# Altium PCB TDA7000_PCB.PcbDoc
Units mm, origin at the board's own origin, x right, y up, seen from the top; angles counter-clockwise.
Board outline 33.01 x 89.01 mm, 2 copper layers (Top Layer, Jumper Layer); 41 components, 37 nets, 144 pads, 0 vias.
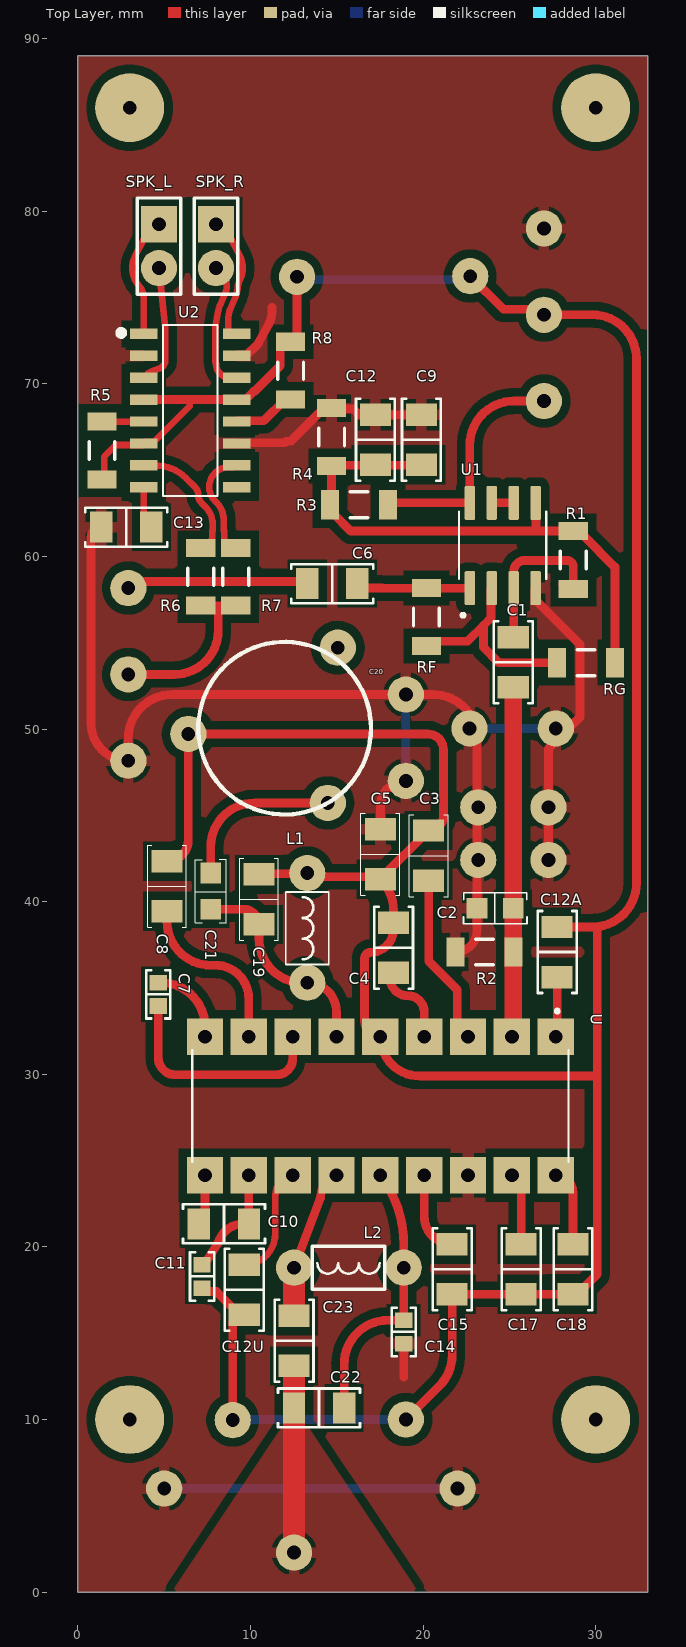
[diagram p0: Top Layer view]
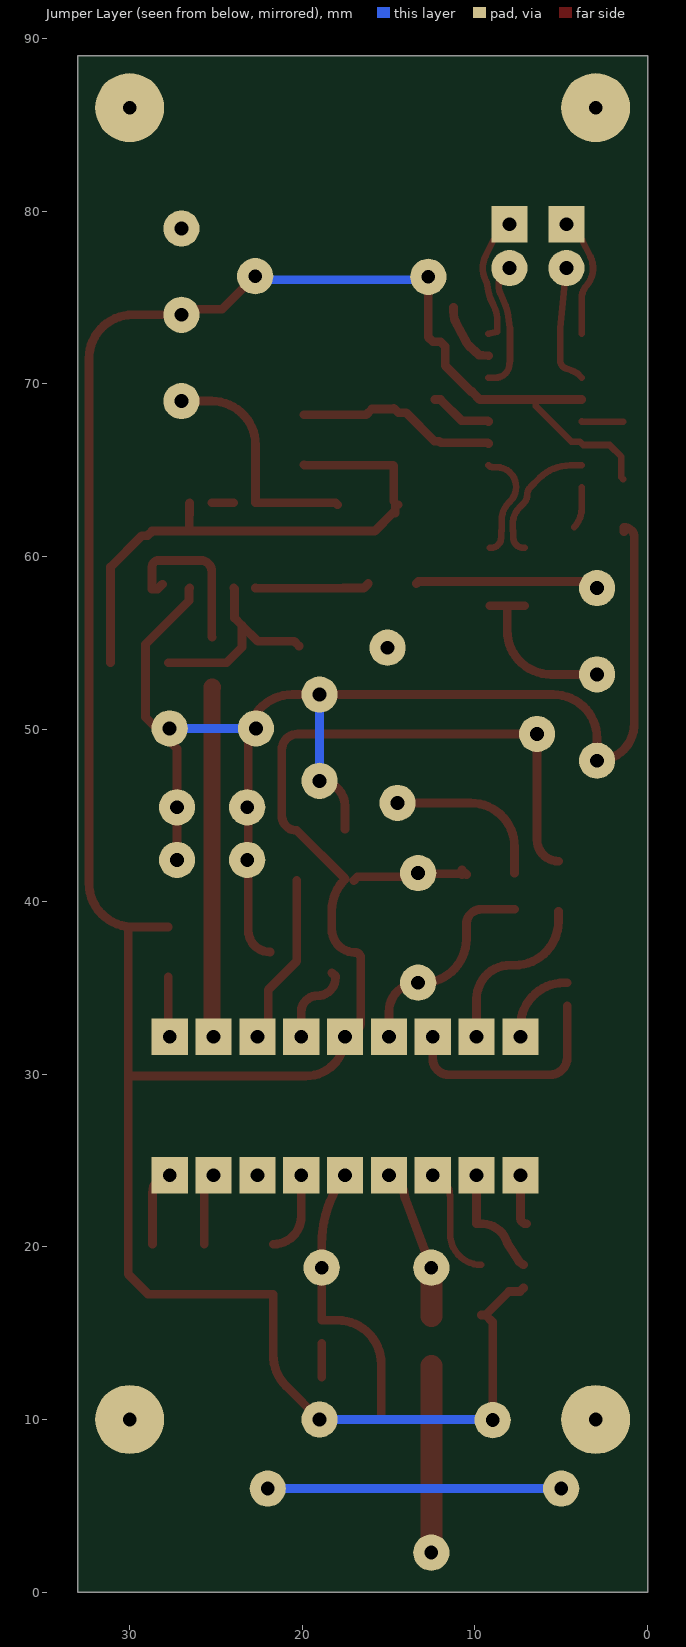
[diagram p1: Jumper Layer view, seen from below]
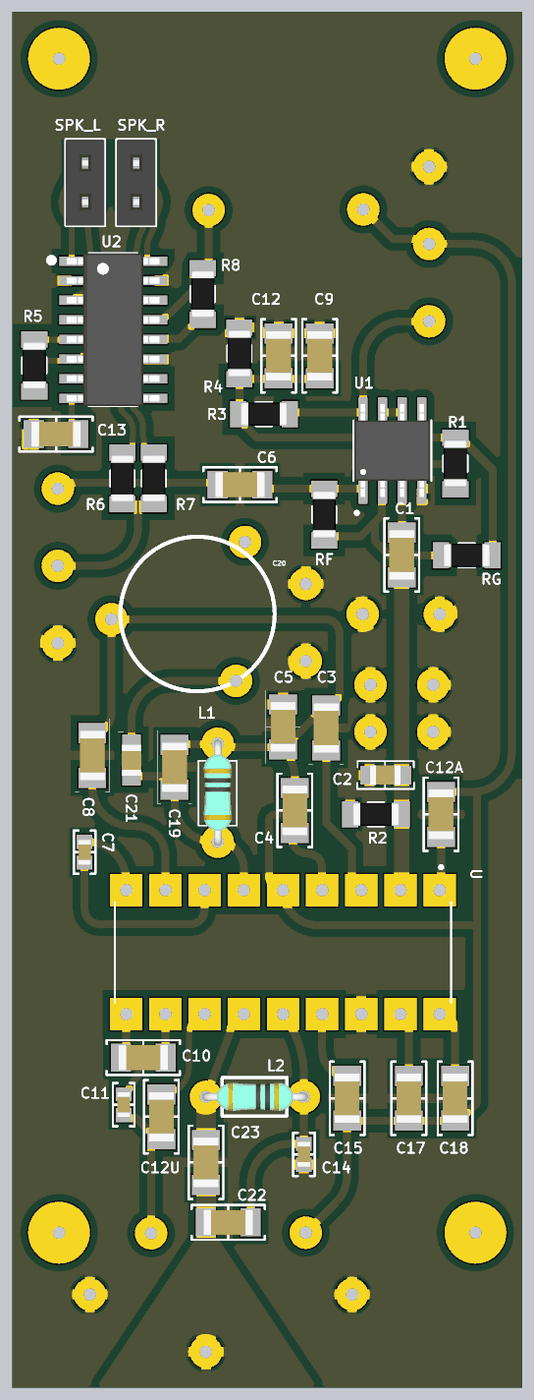
[diagram p2: 3D render of the assembled board from above, using the file's embedded part models]

## Layer stack, top to bottom
Top Solder: solder mask 0.0102, Solder Resist, Dk 3.5
Top Layer: signal copper 0.0356
Dielectric 1: dielectric 0.32, FR-4, Dk 4.8
Jumper Layer: signal copper 0.0356
Bottom Solder: solder mask 0.0102, Solder Resist, Dk 3.5

## Board outline
0,-0.005 33,-0.005 33.005,0 33.005,89 33,89.005 0,89.005 -0.005,89

## Design rules (kind name [scope] priority, off if disabled: settings)
Clearance [All] p1: gap=0.254 ignorepadtopadclearanceinfootprint=FALSE except(0.5: Arc-Poly Track-Poly SMDPad-Poly THPad-Poly Via-Poly Fill-Poly Poly-Poly Poly-Region Poly-Text Poly-Hole)
DiffPairsRouting [All] p1: maxlimit=0.254 minlimit=0.254 mostfreqgap=0.254 toplayer_minwidth=0.381 toplayer_maxwidth=0.381 toplayer_prefwidth=0.381 bottomlayer_minwidth=0.381 bottomlayer_maxwidth=0.381 bottomlayer_prefwidth=0.381 maxuncoupledlength=12.7
PolygonConnect [All] p1: connectstyle=Relief reliefconductorwidth=0.635 reliefentries=4 polygonreliefangle="90 Angle" airgapwidth=0.254
RoutingVias [All] p1: holewidth=0.711 width=1.27 viastyle="Through Hole" minholewidth=0.711 minwidth=1.27 maxholewidth=0.711 maxwidth=1.27
SilkToSilkClearance [All] p1: silktosilkclearance=0.1
SilkToSolderMaskClearance [IsPad] p1: minsilkscreentomaskgap=0.1 clearancetoexposedcopper=TRUE
SolderMaskExpansion [All] p1: expansion=0.102 istentingtop=FALSE
SupplyNets "Schematic Supply Nets_7" [InNet('+12V')] p1: voltage=0.000
SupplyNets "Schematic Supply Nets_6" [InNet('+5V')] p2: voltage=0.000
SupplyNets "Schematic Supply Nets_5" [InNet('Vref')] p3: voltage=0.000
SupplyNets "Schematic Supply Nets_4" [InNet('PREAMP')] p4: voltage=0.000
SupplyNets "Schematic Supply Nets_3" [InNet('OUTPUT')] p5: voltage=0.000
SupplyNets "Schematic Supply Nets_2" [InNet('GND')] p6: voltage=0.000
SupplyNets "Schematic Supply Nets" [InNet('ANT')] p7: voltage=0.000
Width [All] p1: maxlimit=1.397 minlimit=0.254 preferedwidth=0.254 minimp=50.000000 maximp=50.000000 favimp=50.000000
27 further rules are at their usual default settings.

## Classes and differential pairs
differential pair IN: +IN_P -IN_N
differential pair SPK_R: +SPK_R_P -SPK_R_N
differential pair SPK_L: +SPK_L_P -SPK_L_N

## Components (designator, comment, footprint, x,y, rotation, side; value= is the part's Value field where it differs from the comment)
C1 "1uF" "CAP 1206/3216" 25.222,53.876 r90 top
C2 "1.8nF" "CAP 0805/2012" 24.151,39.624 r180 top
C3 "22nF" "CAP 1206/3216" 20.32,42.672 r90 top
C4 "10nF" "CAP 1206/3216" 18.288,37.338 r90 top
C5 "10nF" "CAP 1206/3216" 17.526,42.746 r270 top
C6 "1uF" "CAP 1206/3216" 14.732,58.426 r180 top
C7 "3.3nF" "CAP 0603/1608" 4.652,34.631 r90 top
C8 "180pF" "CAP 1206/3216" 5.16,40.894 r270 top
C9 "10uF" "CAP 1206/3216" 19.902,66.765 r270 top
C10 "330pF" "CAP 1206/3216" 8.462,21.336 r0 top
C11 "3.3nF" "CAP 0603/1608" 7.192,18.288 r270 top
C12 "100nF" "CAP 1206/3216" 17.235,66.765 r270 top
C12A "150nF" "CAP 1206/3216" 27.766,37.084 r90 top
C12U "150pF" "CAP 1206/3216" 9.635,17.506 r270 top
C13 "1uF" "CAP 1206/3216" 2.806,61.695 r0 top
C14 "2.2nF" "CAP 0603/1608" 18.876,15.073 r270 top
C15 "100nF" "CAP 1206/3216" 21.682,18.7 r90 top
C17 "330pF" "CAP 1206/3216" 25.682,18.7 r90 top
C18 "220pF" "CAP 1206/3216" 28.682,18.7 r90 top
C19 "27pF" "CAP 1206/3216" 10.494,40.132 r270 top
C20 "VISHAY Trimmer Cap Fig1" FIG2 11.978,50.05 r30 top
C21 "56pF" "CAP 0805/2012" 7.7,40.581 r270 top
C22 "47pF" "CAP 1206/3216" 13.97,10.668 r180 top
C23 "39pF" "CAP 1206/3216" 12.526,14.552 r270 top
L1 "56nH" "Inductor - 10uH (1/8)" 13.288,41.656 r270 top
L2 "Value?" "Inductor - 10uH (1/8)" 18.876,18.796 r180 top
R1 "100k" "RES 1206 (3216X08L)" 28.702,58.495 r90 top
R2 "22k" "RES 1206 (3216X08L)" 22.253,37.084 r0 top
R3 "47k" "RES 1206 (3216X08L)" 14.986,62.992 r0 top
R4 "47k" "RES 1206 (3216X08L)" 14.695,68.214 r270 top
R5 "10k" "RES 1206 (3216X08L)" 1.397,67.437 r270 top
R6 "1k" "RES 1206 (3216X08L)" 7.112,60.123 r270 top
R7 "1k" "RES 1206 (3216X08L)" 9.144,60.123 r270 top
R8 "10k" "RES 1206 (3216X08L)" 12.319,72.061 r270 top
RF "22k" "RES 1206 (3216X08L)" 20.193,57.785 r270 top
RG "10k" "RES 1206 (3216X08L)" 30.734,53.848 r180 top
SPK_L "2" HDR_THT_2F_2.54mm#1 4.699,77.978 r270 top
SPK_R "2" HDR_THT_2F_2.54mm#2 8.001,77.978 r90 top
U "TDA7000" DIP802W45P254L2180H470Q18 17.522,28.162 r270 top
U1 "NE5532D" SOIC127P599X175-8N 24.613,60.636 r90 top
U2 "PAM8403DR" SOIC127P605X150-16N 6.51,68.453 r0 top

## Footprints (in the part's own frame and the unit in brackets; to place one, negate y for a bottom-side part, rotate by r counter-clockwise, add the part's x,y. Pads: shape width x height; smd on the part's side, far side on the other; paste and mask are expansions set on the pad)
"CAP 0603/1608" [mm] "Chip Capacitor, 2-Leads, Body 1.60x0.80mm, IPC Medium Density"
  rect 0.9x1 smd: 1(-0.675,0) 2(0.675,0)
  silkscreen extent -1.4,-0.7 1.4,0.7, body extent -0.8,-0.41 0.8,0.41, height 0.82
"CAP 0805/2012" [mm] "Chip Capacitor, 2-Leads, Body 2.00x1.20mm, IPC Medium Density"
  rect 1.2x1.2 smd: 1(-1.075,0) 2(1.025,0)
  silkscreen extent -1.86,-0.9 1.82,0.9, body extent -1,-0.64 1,0.64, height 1.26
"CAP 1206/3216" [mm] "Chip Capacitor, 2-Leads, Body 3.25x1.60mm, IPC Medium Density"
  rect 1.3x1.8 smd: 1(-1.45,0) 2(1.45,0)
  silkscreen extent -2.37,-1.12 2.37,1.12, body extent -1.6,-0.81 1.6,0.81, height 1.62
DIP802W45P254L2180H470Q18 [mm]
  rect 2.1x2.1 hole 0.8: 1(-4.012,10.16) 2(-4.012,7.62) 3(-4.012,5.08) 4(-4.012,2.54) 5(-4.012,0) 6(-4.012,-2.54) 7(-4.012,-5.08) 8(-4.012,-7.62) 9(-4.012,-10.16) 10(4.012,-10.16) 11(4.012,-7.62) 12(4.012,-5.08) 13(4.012,-2.54) 14(4.012,0) 15(4.012,2.54) 16(4.012,5.08) 17(4.012,7.62) 18(4.012,10.16)
  silkscreen extent -5.6,-10.9 3.24,10.9
FIG2 [mm]
  round 2.1 hole 0.8: 0(-5,2.5) 1(0,-5) 2(5,2.5)
  silkscreen extent -5,-5 5,5
HDR_THT_2F_2.54mm#1 [mm] "Socket Header, Pitch 2.54 mm, THT, Vertical, single row, 2p"
  rect 2.1x2.1 hole 0.8: 1(-1.27,0)
  round 2.1 hole 0.8: 2(1.27,0)
  silkscreen extent -2.79,-1.25 2.79,1.25, body extent -2.79,-1.25 2.79,1.25, height 8.55
HDR_THT_2F_2.54mm#2 [mm] "Socket Header, Pitch 2.54 mm, THT, Vertical, single row, 2p"
  round 2.1 hole 0.8: 1(-1.27,0)
  rect 2.1x2.1 hole 0.8: 2(1.27,0)
  silkscreen extent -2.79,-1.25 2.79,1.25, body extent -2.79,-1.25 2.79,1.25, height 8.55
"Inductor - 10uH (1/8)" [mm]
  round 2.1 hole 0.8: 1(0,0) 2(6.35,0)
  silkscreen extent 1.1,-1.25 5.3,1.25, body extent -0.25,-0.92 6.6,0.92, height 2.92
"RES 1206 (3216X08L)" [mm] "Chip Resistor, 2-Leads, Body 3.2x1.6mm, IPC High Density _ (0.125 W)"
  rect 1.05x1.7 smd: 1(-0.377,0) 2(2.973,0)
  silkscreen extent 0.8,-0.75 1.8,0.75, body extent -0.23,-0.76 2.82,0.76, height 0.6
SOIC127P599X175-8N [mm]
  rrect25% 1.97x0.6 smd paste+0 mask+0.102: 1(-2.47,1.905) 2(-2.47,0.635) 3(-2.47,-0.635) 4(-2.47,-1.905) 5(2.47,-1.905) 6(2.47,-0.635) 7(2.47,0.635) 8(2.47,1.905)
  silkscreen extent -4.14,-2.53 1.95,2.53, body extent -3,-2.45 3,2.45, height 1.75
SOIC127P605X150-16N [mm]
  rect 1.6x0.6 smd paste+0 mask+0.102: 1(-2.7,4.445) 2(-2.7,3.175) 3(-2.7,1.905) 4(-2.7,0.635) 5(-2.7,-0.635) 6(-2.7,-1.905) 7(-2.7,-3.175) 8(-2.7,-4.445) 9(2.7,-4.445) 10(2.7,-3.175) 11(2.7,-1.905) 12(2.7,-0.635) 13(2.7,0.635) 14(2.7,1.905) 15(2.7,3.175) 16(2.7,4.445)
  silkscreen extent -4.14,-4.95 1.58,4.95, body extent -3,-4.95 3,4.95, height 1.75

## Part data
C1 C3 C4 C5 C6 C9 C12 C12A C13 C15: library part Cap_Multi_SMD, "Bipolar ceramic capacitor SMD", Package=1206, Rating=X7R, Type=Type?, Validation=Valid, Inflow=inflow?
C2 C19 C21: library part Cap_Multi_SMD, "Bipolar ceramic capacitor SMD", Package=0805, Rating=C0G, Type=Type?, Validation=Valid, Inflow=inflow?
C7 C11 C14: library part Cap_Multi_SMD, "Bipolar ceramic capacitor SMD", Package=0603, Rating=C0G, Type=Type?, Validation=Valid, Inflow=inflow?
C8 C10 C12U C17 C18 C22 C23: library part Cap_Multi_SMD, "Bipolar ceramic capacitor SMD", Package=1206, Rating=C0G, Type=Type?, Validation=Valid, Inflow=inflow?
L1 L2: library part Ind_THT, "Inductor", Package=Package?, Rating=Rating?, Type=Type?, Validation=NT, Inflow=inflow?
R1 R2 R3 R4 R5 R6 R7 R8 RF RG: library part Res_SMD, "Resistor", Package=1206, Rating=Rating?, Type=10%, Validation=Valid, Inflow=inflow?
SPK_L SPK_R: library part Con_FPH_2x1_V_THT_2.54, "Header, single row, 2 pin", Package=Package?, Rating=Rating?, Type=Type?, Validation=NT, Inflow=8101
U: Package="DIP-18 MCM Electronics", Availability=Unavailable, MF="MCM Electronics", MP=TDA7000, Price=None, SnapEDA_Link=https://www.snapeda.com/parts/TDA7000/MCM%20Electronics/view-part/577349/?ref=snap
U1: "Dual, 30-V, 10-MHz, low-noise operational amplifier for audio applications", Package="SOIC-8 Texas Instruments", Check_prices=https://www.snapeda.com/parts/NE5532D/Texas+Instruments/view-part/?ref=eda, MF="Texas Instruments", MP=NE5532D, SnapEDA_Link=https://www.snapeda.com/parts/NE5532D/Texas+Instruments/view-part/?ref=snap
U2: "Amplifiers, Audio, 3W STEREO FILTERLESS CLASS-D AUDIO AMP", Package="SOP-16 Diodes Inc.", Check_prices=https://www.snapeda.com/parts/PAM8403DR/Diodes+Inc./view-part/?ref=eda, MF="Diodes Inc.", MP=PAM8403DR, SnapEDA_Link=https://www.snapeda.com/parts/PAM8403DR/Diodes+Inc./view-part/?ref=snap

## Free pads (board coordinates)
  round 4 hole 0.8: 0(3,10) 0(3,86) 0(30,10) 0(30,86)
  round 2.1 hole 0.8: 1(2.921,58.166) 2(2.921,53.166) 3(2.921,48.166) 9(12.526,2.286) 9(19,47) 9(19,52) 9(22.686,50.038) 9(23.194,42.418) 9(23.194,45.466) 9(27.258,42.418) 9(27.258,45.466) 9(27.686,50.038) 13(5,6) 13(8.97,9.962) 13(12.7,76.2) 13(19,10) 13(22,6) 13(22.73,76.238) 13(27,69) 13(27,74) 13(27,79)

## Nets (pads, with @x,y where several pads share a name; then routed paths per layer and width w, separated by ;. In a path a pad name is that pad's centre, name@x,y a point inside that pad or via, vN(x,y) a via of type N, cw(c..) or ccw(c..) an arc to the next point about the centre after c; other vN are vias at no path point)
+5V: C3.2 C4.2 C5.2 C8.1 C11.2 C12A.2 C12U.2 C15.1 C17.1 C18.1 C19.1 C20.0 L1.1 pad.13@8.97,9.962 pad.13@12.7,76.2 pad.13@19,10 pad.13@22.73,76.238 pad.13@27,74 R5.2 R8.1 U2.4 U2.6 U2.13 U.5 | length 201.8
  Top Layer w0.381: R5.2 1.524,64.591 1.524,65.786 2.194,66.456 3.718,66.456 3.919,66.657 4.42,66.657 6.477,68.715 6.477,69.088
  Top Layer w0.508: U2.4 6.477,69.088 9.71,69.088 10.172,69.55 10.22,69.55 11.723,71.053 11.723,72.167 11.994,72.438 12.429,72.438 12.7,72.709 pad.13@12.7,76.2 ; C8.1 ccw(c5.16,43.582) 6.398,43.582 C20.0 20.262,49.715 cw(c20.262,48.793) 21.184,48.793 21.184,44.986 cw(c20.32,44.986) C3.2 17.549,41.351 ccw(c17.603,41.296) C5.2 17.544,41.278 cw(c15.748,39.482) 18.288,39.482 C4.2 18.288,38.405 cw(c16.942,38.405) 16.942,37.059 ccw(c16.942,36.728) 16.612,36.728 16.612,33.085 ccw(c17.522,33.085) U.5 ccw(c19.801,32.175) 19.801,29.896 30,29.896 30.09,29.806 ; C11.2 7.388,17.417 8.024,17.417 C12U.2@9.385,16.056 ; pad.13@8.97,9.962 8.97,15.641 C12U.2@9.385,16.056 ; C12U.2 C12U.2@9.385,16.056 ; C19.1 C19.1@10.748,41.836 ; C19.1@10.748,41.578 10.789,41.619 13.251,41.619 L1.1 13.505,41.439 16.801,41.439 C5.2@17.018,41.222 ; pad.13@19,10 20.938,11.938 ccw(c19.142,13.734) 21.682,13.734 C15.1 C17.1 28.932,17.25 30.09,18.408 30.09,29.806 ; pad.13@22.73,76.238 22.739,76.238 24.653,74.324 26.676,74.324 27,74 29.82,74 cw(c29.82,71.46) 32.36,71.46 32.36,41.074 cw(c29.82,41.074) 29.919,38.536 cw(c29.82,41.074) 29.82,38.534 C12A.2 ; 29.919,38.534 30.09,38.363 30.09,29.806
  Jumper Layer w0.508: pad.13@8.97,9.962 9.008,10 pad.13@19,10 ; pad.13@12,76 cw(c12.038,76) 12.038,76.038 pad.13@22.03,76.038
+12V: pad.13@27,69 R3.2 U1.8 | length 13.9
  Top Layer w0.508: R3.2 18.073,63.106 U1.8 22.708,66.46 cw(c25.248,66.46) 25.248,69 pad.13@27,69
AMP_IN: pad.2 R6.2 R7.2 | length 10.1
  Top Layer w0.508: pad.2 5.588,53.166 ccw(c5.588,55.706) 8.128,55.706 8.128,57.15 ; R6.2 8.128,57.15 ; R7.2 8.128,57.15
ANT: C22.2 C23.2 pad.9@12.526,2.286 | length 10.8
  Top Layer w1.27: pad.9@12.526,2.286 12.526,10.16 C23.2
GND: C2.2 C5.1 C9.1 C12.1 C13.1 C14.2 pad.3 pad.9@19,47 pad.9@19,52 pad.9@22.686,50.038 pad.9@23.194,42.418 pad.9@23.194,45.466 pad.9@27.258,42.418 pad.9@27.258,45.466 pad.9@27.686,50.038 pad.13@5,6 pad.13@22,6 pad.13@27,79 R2.1 R4.1 U1.4 U2.2 U2.11 U2.15 U.16 | length 118.6
  Top Layer w0.508: C13.1@1.356,61.445 C13.1 ccw(c1.356,61.1) 0.762,61.1 0.762,50.325 ccw(c2.921,50.325) pad.3 ; pad.3@2.921,48.317 pad.3 ; U2.11 9.256,66.594 11.984,66.594 12.065,66.675 12.34,66.675 13.985,68.32 14.424,68.32 R4.1 ; U2.15 9.756,71.674 10.354,72.224 ccw(c10.01,72.598) 10.455,72.354 11.05,73.44 ccw(c9.714,74.172) 11.238,74.172 11.238,74.422 ; R4.1@14.743,68.543 15.965,68.543 16.293,68.215 C9.1 ; C5.1 17.526,45.526 cw(c19,45.526) pad.9@19,47 ; 18.876,12.446 C14.2 ; R2.1 ccw(c21.876,38.334) 23.126,38.334 C2.2 23.126,49.46 ccw(c20.586,49.46) 20.586,52 19,52 5.461,52 ccw(c5.461,49.46) 2.921,49.46 pad.3 ; U1.4 26.564,58.12 26.564,57.435 29.083,54.916 29.083,50.689 27.258,48.864 27.258,45.466 pad.9@27.258,42.418
  Jumper Layer w0.508: pad.13@5,6 pad.13@22,6 ; pad.9@19,47 pad.9@19,52 ; pad.9@22.686,50.038 pad.9@27.686,50.038
IN_N: R7.1 U2.10 | length 6.5
  Top Layer w0.381: R7.1 9.056,60.5 cw(c9.056,61.071) 8.652,60.667 cw(c9.056,61.071) 8.484,61.071 8.484,61.437 ccw(c8.418,61.437) 8.465,61.485 cw(c8.512,61.532) 8.445,61.532 8.445,62.121 ccw(c7.015,62.121) 8.026,63.133 7.942,63.217 cw(c8.75,64.026) 7.607,64.026 cw(c8.75,64.026) 7.942,64.834 7.986,64.877 cw(c8.689,64.174) 8.689,65.169 8.946,65.169 ccw(c8.946,65.542) U2.10
IN_P: R6.1 U2.7 | length 7.6
  Top Layer w0.381: U2.7 4.471,65.278 cw(c4.471,62.738) 6.267,64.534 6.782,64.019 cw(c6.321,63.559) 6.972,63.559 ccw(c7.624,63.559) 7.163,63.098 7.391,62.87 cw(c6.38,61.858) 7.81,61.858 7.81,61.532 cw(c7.744,61.532) 7.791,61.485 ccw(c7.838,61.437) 7.772,61.437 7.772,61.071 cw(c7.2,61.071) 7.604,60.667 cw(c7.2,61.071) 7.2,60.5 R6.1
NetC1_2: C1.2 R1.1 U1.3 | length 9.8
  Top Layer w0.508: C1.2 25.248,55.351 U1.3 25.248,59.131 cw(c25.883,59.131) 25.883,59.766 28.346,59.766 cw(c28.346,59.411) 28.702,59.411 R1.1 28.377,58.118 R1.1@28.106,58.389
NetC3_1: C3.1 U.3 | length 10
  Top Layer w0.508: C3.1 20.32,36.547 21.975,34.892 21.975,32.802 U.3
NetC4_1: C4.1 U.4 | length 4.9
  Top Layer w0.508: C4.1 18.072,35.672 18.072,35.602 ccw(c19.13,35.602) 19.13,34.544 cw(c19.13,33.612) 20.062,33.612 U.4
NetC6_1: C6.1 RF.1 U1.1 | length 6.6
  Top Layer w0.508: C6.1 16.442,58.166 17.632,58.166 17.636,58.162 RF.1 22.704,58.162 U1.1
NetC7_1: C7.1 U.7 | length 13.1
  Top Layer w0.508: C7.1 4.652,30.969 ccw(c5.649,30.969) 5.649,29.972 11.51,29.972 ccw(c11.51,30.904) 12.442,30.904 U.7
NetC7_2: C7.2 U.9 | length 4.8
  Top Layer w0.508: C7.2 4.822,35.306 cw(c4.822,32.766) 7.362,32.766 U.9
NetC8_2: C8.2 U.8 | length 10.1
  Top Layer w0.508: C8.2 5.16,38.862 ccw(c7.7,38.862) 7.7,36.322 7.954,36.322 cw(c7.954,34.374) 9.902,34.374 U.8
NetC10_1: C10.1 U.10 | length 3
  Top Layer w0.508: C10.1 ccw(c7.012,21.686) 7.362,21.686 U.10
NetC10_2: C10.2 C11.1 U.11 | length 6.7
  Top Layer w0.508: C11.1 7.438,19.159 8.088,20.159 ccw(c7.662,20.436) 8.146,20.281 cw(c9.596,19.812) 9.516,21.334 9.565,21.336 C10.2 9.902,21.336 U.11
NetC12A_1: C12A.1 U.1 | length 3.5
  Top Layer w0.508: U.1 ccw(c27.682,32.259) 27.766,32.259 C12A.1
NetC12U_1: C12U.1 U.12 | length 6.7
  Top Layer w0.381: C12U.1 ccw(c9.635,20.751) 11.43,20.751 11.43,22.824 cw(c12.573,22.822) 11.442,22.985 ccw(c11.002,23.05) 11.446,23.042 cw(c12.589,23.017) 11.532,23.452 U.12
NetC13_2: C13.2 U2.8 | length 2.4
  Top Layer w0.381: U2.8 3.81,62.772 ccw(c5.334,62.772) C13.2
NetC14_1: C14.1 C22.1 L2.1 U.14 | length 16.6
  Top Layer w0.508: C22.1@15.426,10.16 15.426,13.208 cw(c17.966,13.208) 17.966,15.748 C14.1 L2.1 18.876,20.168 ccw(c12.343,20.168) U.14
NetC15_2: C15.2 U.15 | length 4.9
  Top Layer w0.508: U.15 20.062,21.77 ccw(c21.682,21.77) C15.2
NetC17_2: C17.2 U.17 | length 4.3
  Top Layer w0.508: U.17 cw(c25.142,23.61) 25.682,23.61 C17.2
NetC18_2: C18.2 U.18 | length 4.6
  Top Layer w0.508: U.18 cw(c27.682,23.15) 28.682,23.15 C18.2
NetC19_2: C19.2 C21.2 L1.2 U.6 | length 12.5
  Top Layer w0.508: C21.2 9.62,39.556 cw(c9.62,38.682) C19.2 10.494,37.846 ccw(c13.034,37.846) 13.034,35.306 L1.2 cw(c13.288,33.612) 14.982,33.612 U.6
NetC20_1: C20.1 C21.1 | length 9.8
  Top Layer w0.508: C21.1 7.7,43.18 cw(c10.24,43.18) 10.24,45.72 C20.1
NetC23_1: C23.1 L2.2 U.13 | length 8.8
  Top Layer w0.508: L2.2 14.05,22.84 14.136,23.304 U.13
  Top Layer w1.27: C23.1 L2.2
NetR5_1: R5.1 U2.5 | length 2.4
  Top Layer w0.381: R5.1 1.399,67.816 3.808,67.816 U2.5
NetR8_2: R8.2 U2.12 | length 3.6
  Top Layer w0.508: U2.12 9.256,67.864 10.77,67.864 11.994,69.088 R8.2
NetRF_2: RF.2 RG.2 U1.2 | length 12.1
  Top Layer w0.508: RF.2 20.464,55.083 22.575,55.083 23.495,56.003 ; U1.2 23.932,58.12 23.932,56.44 23.495,56.003 ; RG.2 24.388,53.848 23.495,54.741 23.495,56.003
NetU1_6: U1.6 U1.7 | length 1.3
  Top Layer w0.508: U1.7 U1.6
OUTPUT: C1.1 C2.1 R2.2 U.2 | length 20.3
  Top Layer w0.508: U.2 U.2@25.226,32.259
  Top Layer w1: C1.1 25.226,52.422 C2.1 R2.2 U.2@25.226,32.259
PREAMP: C6.2 pad.1 | length 10.7
  Top Layer w0.508: pad.1 3.302,58.547 13.282,58.547 C6.2@13.403,58.426
SPK_L_N: SPK_L.2 U2.3 | length 7.1
  Top Layer w0.381: U2.3 3.955,70.503 cw(c4.764,69.696) 4.376,70.771 4.761,70.91 ccw(c4.61,71.328) 5.055,71.328 5.055,73.198 ccw(c4.61,73.198) 5.052,73.245 4.699,76.706 cw(c5.836,76.821) SPK_L.2
SPK_L_P: SPK_L.1 U2.1 | length 7
  Top Layer w0.381: U2.1 3.81,74.949 ccw(c2.667,74.949) 3.532,75.697 cw(c4.699,76.708) 3.319,77.401 3.789,78.338 SPK_L.1
SPK_R_N: SPK_R.2 U2.16 | length 7.4
  Top Layer w0.381: SPK_R.2 8.911,78.338 9.381,77.401 cw(c8.001,76.708) 9.376,76.004 ccw(c10.393,75.483) 9.253,75.565 cw(c7.48,75.691) 9.111,74.983 8.811,74.293 8.811,74.291 ccw(c9.86,73.838) 8.717,73.838 8.717,73.007 U2.16
SPK_R_P: SPK_R.1 U2.14 | length 7.6
  Top Layer w0.381: SPK_R.1 8.006,76.705 cw(c7.48,75.691) 8.528,75.236 8.229,74.546 ccw(c8.811,74.291) 8.227,74.542 ccw(c9.86,73.838) 8.103,74.113 7.971,73.267 ccw(c8.41,73.198) 7.965,73.198 7.965,71.328 ccw(c8.41,71.328) 8.001,71.154 ccw(c8.797,71.154) 8.797,70.358 U2.14
Vref: C9.2 C12.2 R1.2 R3.1 R4.2 RG.1 U1.5 | length 33.6
  Top Layer w0.508: R3.1@14.459,62.992 R3.1 14.609,62.514 14.762,62.514 15.808,61.468 26.543,61.468 ; R3.1@14.695,63.209 R4.2 14.732,65.278 19.865,65.278 C9.2 ; U1.5@26.518,62.421 U1.5 26.543,63.081 26.543,62.421 26.543,61.468 ; RG.1 31.111,59.384 29.298,61.197 28.973,61.197 R1.2 26.543,61.468
pads on no net: C20.2 U2.9

## Polygon pours and split planes (outlines as drawn)
ANT on Top Layer "NONET_L-01_P-001" (solid, pour order 4): 13.157,9.855 12.007,9.855 5.437,0 19.727,0
GND on Top Layer "NONET_L-01_P-001" (solid, pour order 7): 0,89 0,0 33,0 33,89